# EAGLE board CT_schematic (EAGLE 7.6.0)

Size 100 x 80 mm. Coordinates in mm from the lower left corner, seen from the top.
Outline: 0,0 100,0 100,80 0,80 0,0
Copper layers (1*16): Top 0.035mm / dielectric 1.5mm / Bottom 0.035mm
Design rules "default": minimum track width 10mil, minimum drill 24mil, track to track 8mil, track to pad 8mil, pad to pad 8mil, via to via 8mil, smd to smd 8mil, copper to edge 40mil, drill to drill 8mil, minimum pad ring 10mil, minimum via ring 8mil, stop-mask expansion 4mil, vias tented up to drill 0mil, thermal gap 10mil

## Footprints (pad centres in the part's own frame; a part is rotated, then mirrored left to right if it is on the bottom)
C0603 = smd 0.8 x 0.8: 1 -0.762,0; 2 0.762,0
C0402 = smd 0.5 x 0.5: 1 -0.508,0; 2 0.508,0
C1206 = smd 1.3 x 1.6: 1 -1.524,0; 2 1.524,0
C1210 = smd 1.2 x 2.5: 1 -1.524,0; 2 1.524,0
EXV-9H = smd 3.505 x 1.676: 1 -2.857,0; 2 2.857,0
L0603 = smd 0.8 x 0.8: 1 -0.762,0; 2 0.762,0
PJ-037B_PACKAGE = drill 3.7 square: 1 12,0 | drill 3.2 square: 2 6,0
R0603 = smd 0.8 x 0.8: 1 -0.762,0; 2 0.762,0
UFQFPN32 = smd 0.6 x 0.3: 1 -2.35,1.75; 2 -2.35,1.25; 3 -2.35,0.75; 4 -2.35,0.25; 5 -2.35,-0.25; 6 -2.35,-0.75; 7 -2.35,-1.25; 8 -2.35,-1.75; 17 2.35,-1.75; 18 2.35,-1.25; 19 2.35,-0.75; 20 2.35,-0.25; 21 2.35,0.25; 22 2.35,0.75; 23 2.35,1.25; 24 2.35,1.75 | smd 0.3 x 0.6: 9 -1.75,-2.35; 10 -1.25,-2.35; 11 -0.75,-2.35; 12 -0.25,-2.35; 13 0.25,-2.35; 14 0.75,-2.35; 15 1.25,-2.35; 16 1.75,-2.35; 25 1.75,2.35; 26 1.25,2.35; 27 0.75,2.35; 28 0.25,2.35; 29 -0.25,2.35; 30 -0.75,2.35; 31 -1.25,2.35; 32 -1.75,2.35 | smd 3.45 x 3.45: EPAD 0,0
A2200-A = smd 1.5 x 0.8: 1 -4.85,6.35; 2 -4.85,5.08; 3 -4.85,3.81; 4 -4.85,2.54; 5 -4.85,1.27; 6 -4.85,0; 7 -4.85,-1.27; 8 -4.85,-2.54; 9 -4.85,-3.81; 10 -4.85,-5.08; 11 -4.85,-6.35; 12 4.85,-6.35; 13 4.85,-5.08; 14 4.85,-3.81; 15 4.85,-2.54; 16 4.85,-1.27; 17 4.85,0; 18 4.85,1.27; 19 4.85,2.54; 20 4.85,3.81; 21 4.85,5.08; 22 4.85,6.35 | smd 1.2 x 1.2: 23 -2,2; 24 -2,0; 25 -2,-2; 26 0,-2; 27 0,0; 28 0,2; 29 2,2; 30 2,0; 31 2,-2
COAXIAL_C = smd 1 x 1: 1 0,-1.5; 2 0,1.5 | smd 1.05 x 2.2: 3 -1.475,0; 4 1.475,0
SAMTEC_FTSH-105-01-L-DV-K = smd 0.762 x 2.794: 1 -2.54,-2.032; 2 -2.54,2.032; 3 -1.27,-2.032; 4 -1.27,2.032; 5 0,-2.032; 6 0,2.032; 7 1.27,-2.032; 8 1.27,2.032; 9 2.54,-2.032; 10 2.54,2.032
ABLS-25.000MHZ-B2F-T = smd 5.6 x 2.8: 1 -3.81,0; 2 5.69,0
WSON-8 = smd 0.3 x 0.6: 1 -0.75,0; 2 0.05,0; 3 0.85,0; 4 1.65,0; 5 1.65,3.8; 6 0.85,3.8; 7 0.05,3.8; 8 -0.75,3.8 | smd 3 x 2.6: PAD 0.45,1.9
SON-6 = smd 0.55 x 0.3: 1 -0.355,0.5 | smd 0.52 x 0.3: 2 -0.37,0; 3 -0.37,-0.5; 4 0.37,-0.5; 5 0.37,0; 6 0.37,0.5
SW_4-1437565-2 = smd 1.4 x 2.1: 1 -2.23,4.55; 2 -2.23,-4.55; 3 2.23,4.55; 4 2.23,-4.55
LGM67K-G1J2-24-Z = smd 0.8 x 1.4: A -2,0; C 0,0
NC7SZ125M5X = smd 1.3 x 0.7: 1 -1.3,0.95; 2 -1.3,0; 3 -1.3,-0.95; 4 1.3,-0.95; 5 1.3,0.95
DUMMY_PACKAGE_111 = drill 0.3: 1 0,-1; 2 1.5,-1; 3 3,-1

## Placement (x,y rotation side)
C1  1e-07  [C0603]  -33.02,59.69 0 top  (outside the outline)
C2  1e-07  [C0603]  -36.83,59.69 0 top  (outside the outline)
C3  4.7e-06  [C0603]  -29.21,59.69 0 top  (outside the outline)
C4  1e-08  [C0603]  -40.64,59.69 0 top  (outside the outline)
C5  1e-06  [C0603]  -44.45,59.69 0 top  (outside the outline)
C6  1e-11  [C0402]  -38.1,64.77 0 top  (outside the outline)
C7  1e-11  [C0402]  -41.91,64.77 0 top  (outside the outline)
C8  1e-07  [C0402]  -45.72,64.77 0 top  (outside the outline)
C9  1e-07  [C0402]  -49.53,64.77 0 top  (outside the outline)
C10  1e-08  [C0402]  -53.34,64.77 0 top  (outside the outline)
C11  1e-05  [C1206]  -55.88,45.72 0 top  (outside the outline)
C12  1e-05  [C1210]  -49.53,46.99 0 top  (outside the outline)
C13  1e-07  [C0402]  -57.15,64.77 0 top  (outside the outline)
C14  0.0001  [EXV-9H]  -49.53,38.1 0 top  (outside the outline)
C15  0.0001  [EXV-9H]  -60.96,38.1 0 top  (outside the outline)
C16  1e-08  [C0402]  -60.96,64.77 0 top  (outside the outline)
C17  1e-08  [C0402]  -64.77,64.77 0 top  (outside the outline)
C18  1e-08  [C0402]  -15.24,69.85 0 top  (outside the outline)
F1  240.0  [L0603]  -48.26,59.69 0 top  (outside the outline)
J1  PJ-037B  [PJ-037B_PACKAGE]  -27.94,26.67 0 top  (outside the outline)
R1  10000.0  [R0603]  -43.18,53.34 0 top  (outside the outline)
R2  1000.0  [R0603]  -52.07,59.69 0 top  (outside the outline)
R3  1600.5  [R0603]  -55.88,59.69 0 top  (outside the outline)
R4  4700.0  [R0603]  -59.69,59.69 0 top  (outside the outline)
R5  4700.0  [R0603]  -63.5,59.69 0 top  (outside the outline)
R6  2200.0  [R0603]  -15.24,64.77 0 top  (outside the outline)
R7  2200.0  [R0603]  -19.05,64.77 0 top  (outside the outline)
R8  10000.0  [R0603]  -48.26,53.34 0 top  (outside the outline)
R9  10000.0  [R0603]  -53.34,53.34 0 top  (outside the outline)
R10  10000.0  [R0603]  -58.42,53.34 0 top  (outside the outline)
R11  10000.0  [R0603]  -63.5,53.34 0 top  (outside the outline)
R12  10000.0  [R0603]  -15.24,59.69 0 top  (outside the outline)
R13  5.0  [R0603]  -22.86,64.77 0 top  (outside the outline)
R14  100000.0  [R0603]  -27.94,53.34 0 top  (outside the outline)
R15  2231.0  [R0603]  -26.67,64.77 0 top  (outside the outline)
R16  1000.0  [R0603]  -30.48,64.77 0 top  (outside the outline)
R17  10000.0  [R0603]  -20.32,59.69 0 top  (outside the outline)
R18  10000.0  [R0603]  -25.4,59.69 0 top  (outside the outline)
R19  9100.0  [R0603]  -34.29,64.77 0 top  (outside the outline)
R20  680000.0  [R0603]  -33.02,53.34 0 top  (outside the outline)
R21  120000.0  [R0603]  -38.1,53.34 0 top  (outside the outline)
U1  stm32f031k6u7  [UFQFPN32]  -59.69,24.13 0 top  (outside the outline)
U2  A2200-A  [A2200-A]  -19.05,10.16 0 top  (outside the outline)
U3  73412-0114  [COAXIAL_C]  -41.91,38.1 0 top  (outside the outline)
U4  FTSH-105-01-L-DV-K  [SAMTEC_FTSH-105-01-L-DV-K]  -48.26,7.62 0 top  (outside the outline)
U5  ABLS-25.000MHZ-B2F-T  [ABLS-25.000MHZ-B2F-T]  -26.67,46.99 0 top  (outside the outline)
U6  LP3878SDX-ADJ/NOPB  [WSON-8]  -30.48,36.83 0 top  (outside the outline)
U7  TPS3895ADRYR  [SON-6]  -24.13,68.58 0 top  (outside the outline)
U8  4-1437565-2  [SW_4-1437565-2]  -44.45,25.4 0 top  (outside the outline)
U9  Q65110A2395  [LGM67K-G1J2-24-Z]  -38.1,46.99 0 top  (outside the outline)
U10  nc7sz125m5x  [NC7SZ125M5X]  -60.96,45.72 0 top  (outside the outline)
U11  nc7sz125m5x  [NC7SZ125M5X]  -15.24,53.34 0 top  (outside the outline)
U12  nc7sz125m5x  [NC7SZ125M5X]  -21.59,53.34 0 top  (outside the outline)
U13  Dummy  [DUMMY_PACKAGE_111]  -21.59,69.85 0 top  (outside the outline)

## Library data of the parts
C1-C18 F1 J1 R1-R21 U1-U13 = circuit_tree

## Nets
CLK_CRYSTAL_U1_2: C6.1 U1.2 U5.1
CLK_CRYSTAL_U1_3: C7.1 U1.3 U5.2
GND: C1.2 C2.2 C3.2 C4.2 C5.2 C6.2 C7.2 C8.2 C9.2 C10.2 C11.2 C12.2 C13.2 C14.2 C15.2 C16.2 C17.2 C18.2 J1.2 R2.2 R8.2 R13.2 R16.2 R19.2 R21.2 U1.EPAD U2.7 U2.8 U2.23 U2.24 U2.25 U2.26 U2.27 U2.28 U2.29 U2.30 U2.31 U4.3 U4.5 U6.3 U6.PAD U7.2 U9.C U10.2 U10.3 U11.1 U11.3 U12.1 U12.3 U13.1
NET_U1_4: R5.1 U1.4 U12.4
NET_U1_5: C4.1 C5.1 F1.1 U1.5
NET_U1_19: R6.1 U1.19 U2.15
NET_U1_20: R7.1 U1.20 U2.16
NET_U1_30: R3.1 U1.30 U9.A
NET_U1_31: R8.1 U1.31
NET_U1_32: R1.1 U1.32 U8.3 U8.4
NET_U2_2: R9.2 U2.2
NET_U2_6: U2.6
NET_U2_17: R9.1 U2.17
NET_U2_19: U2.19
NET_U2_22: R4.1 U2.22 U11.4
NET_U3_1: U2.11 U3.1
NET_U3_2: U2.10 U3.2 U3.3 U3.4
NET_U4_9: R13.1 U4.9
NET_U6_1: C10.1 U6.1
NET_U6_6: R15.2 R16.1 U6.6
NET_U6_8: R14.1 U6.8
NET_U7_1: R18.1 R19.1 U7.1
NET_U7_3: R20.2 R21.1 U7.3
NET_U7_4: R17.1 U7.4 U10.4 U11.2 U12.2
NET_U8_1: R2.1 U8.1 U8.2
PROC_SYS_SWCLK: R11.1 U1.24 U4.4
PROC_SYS_SWDIO: R12.1 U1.23 U4.2
PROC_TIM1_CH3N: U1.15 U13.3
PROC_TIM1_CH4: U1.21 U13.2
RST_OUT_U4_JTAG_RST_B: R10.1 U4.10 U10.1
VCC_S1_10V8: C11.1 C14.1 C15.1 J1.1 R14.2 U6.4
VCC_TIER1_3V3: C1.1 C2.1 C3.1 C8.1 C9.1 C12.1 C13.1 C16.1 C17.1 C18.1 F1.2 R1.2 R3.2 R4.2 R5.2 R6.2 R7.2 R10.2 R11.2 R12.2 R15.1 R17.2 R18.2 R20.1 U1.1 U1.17 U2.20 U4.1 U6.5 U7.6 U10.5 U11.5 U12.5

## Tracks (layer width: path | path; a pad name or v marks a point on that pad's centre or on a via)
CLK_CRYSTAL_U1_2  (2 unrouted)
CLK_CRYSTAL_U1_3  (2 unrouted)
GND  (49 unrouted)
NET_U1_4  (2 unrouted)
NET_U1_5  (3 unrouted)
NET_U1_19  (2 unrouted)
NET_U1_20  (2 unrouted)
NET_U1_30  (2 unrouted)
NET_U1_31  (1 unrouted)
NET_U1_32  (3 unrouted)
NET_U2_2  (1 unrouted)
NET_U2_17  (1 unrouted)
NET_U2_22  (2 unrouted)
NET_U3_1  (1 unrouted)
NET_U3_2  (3 unrouted)
NET_U4_9  (1 unrouted)
NET_U6_1  (1 unrouted)
NET_U6_6  (2 unrouted)
NET_U6_8  (1 unrouted)
NET_U7_1  (2 unrouted)
NET_U7_3  (2 unrouted)
NET_U7_4  (4 unrouted)
NET_U8_1  (2 unrouted)
PROC_SYS_SWCLK  (2 unrouted)
PROC_SYS_SWDIO  (2 unrouted)
PROC_TIM1_CH3N  (1 unrouted)
PROC_TIM1_CH4  (1 unrouted)
RST_OUT_U4_JTAG_RST_B  (2 unrouted)
VCC_S1_10V8  (5 unrouted)
VCC_TIER1_3V3  (32 unrouted)